# Altium PCB modulo_TB66_footprint.PcbDoc
Units mm, origin at the board's own origin, x right, y up, seen from the top; angles counter-clockwise.
Board outline 19 x 12.67 mm, 2 copper layers (Top Layer, Bottom Layer); 11 components, 8 nets, 40 pads, 9 vias.
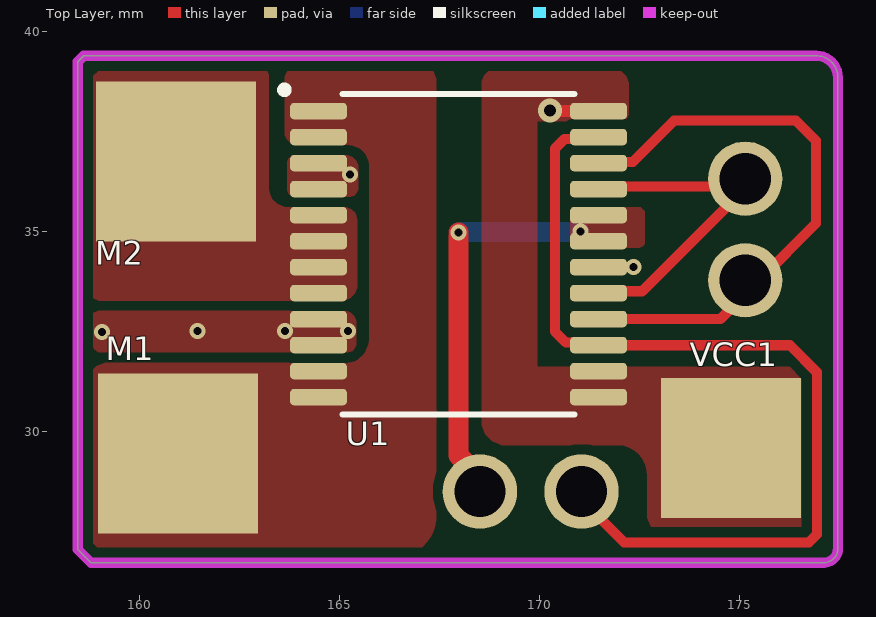
[diagram p0: Top Layer view]
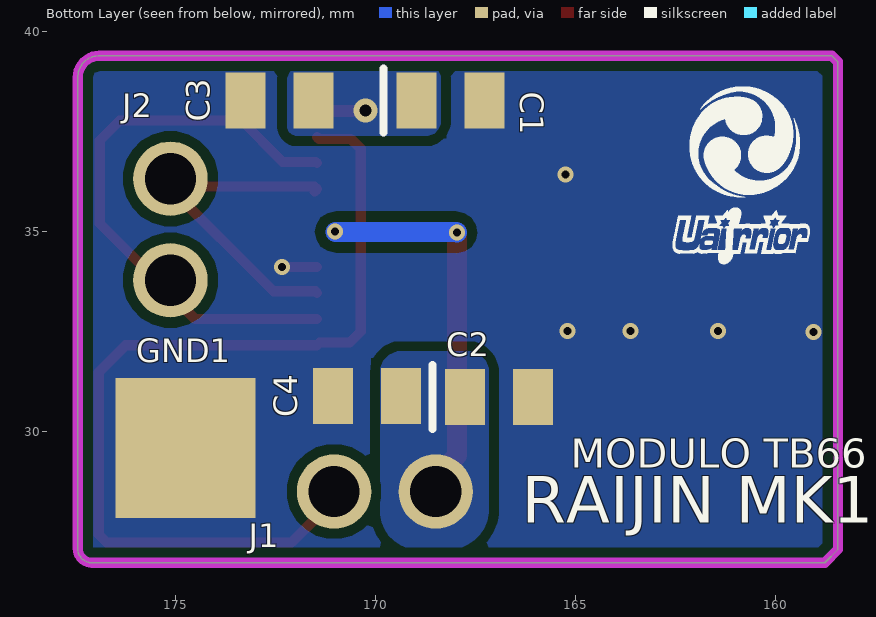
[diagram p1: Bottom Layer view, seen from below]

## Layer stack, top to bottom
Top Solder: solder mask 0.0102, Solder Resist, Dk 3.5
Top Layer: signal copper 0.0356
Dielectric 1: dielectric 0.32, FR-4, Dk 4.8
Bottom Layer: signal copper 0.0356
Bottom Solder: solder mask 0.0102, Solder Resist, Dk 3.5

## Board outline
158.877,39.395 158.598,39.395 158.445,39.243 158.445,27.051 158.775,26.721 177.096,26.721 ccw(c177.096,27.075) 177.45,27.075 177.45,38.85 ccw(c176.905,38.85) 176.905,39.395

## Design rules (kind name [scope] priority, off if disabled: settings)
Clearance [All] p1: gap=0.254 ignorepadtopadclearanceinfootprint=TRUE except(0: Arc-Hole Track-Hole SMDPad-Hole THPad-Hole Via-Hole Fill-Hole Poly-Hole Region-Hole Text-Hole)
PolygonConnect [All] p1: connectstyle=Direct reliefconductorwidth=0.254 reliefentries=4 polygonreliefangle="90 Angle" airgapwidth=0.254
RoutingVias [All] p1: holewidth=0.711 width=1.27 viastyle="Through Hole" minholewidth=0.711 minwidth=1.27 maxholewidth=0.711 maxwidth=1.27
SolderMaskExpansion [All] p1: expansion=0.102 istentingtop=FALSE
Width [All] p1: maxlimit=2 minlimit=0.254 preferedwidth=0.254 minimp=50.000000 maximp=50.000000 favimp=50.000000
30 further rules are at their usual default settings.

## Classes and differential pairs
component class "Esquematico TB66": 2 C1 C2 C3 C4 GND1 J1 J2 M2 VCC1

## Components (designator, comment, footprint, x,y, rotation, side; value= is the part's Value field where it differs from the comment)
C1 "10uF" "TANTALUM C0805" 149.999,48.077 r180 bottom
C2 "10uF" "TANTALUM C0805" 148.782,40.66 r180 bottom
C3 "0.1uF" C0805 154.268,48.077 r180 bottom
C4 "0.1uF" C0805 152.082,40.685 r180 bottom
GND1 "Ground Pad" PAD_ALIMENTAÇÃO_MINI 174.752,29.591 r0 bottom
J1 "Male Header 2" "MALE HEADER 2" 168.5,28.5 r0 bottom
J2 "Male Header 2" "MALE HEADER 2" 175.133,36.322 r270 bottom
M1 "Motor Pad" PAD_MOTOR_MINI#1 160.953,29.447 r0 top
M2 "Motor Pad" PAD_MOTOR_MINI#2 160.9,36.75 r180 bottom
U1 "TB6612FNGC8EL" "SSOP-24 (24_pins)" 167.965,34.436 r0 top
VCC1 "Source Pad" PAD_ALIMENTAÇÃO_MINI 174.777,29.591 r0 top

## Footprints (in the part's own frame and the unit in brackets; to place one, negate y for a bottom-side part, rotate by r counter-clockwise, add the part's x,y. Pads: shape width x height; smd on the part's side, far side on the other; paste and mask are expansions set on the pad)
C0805 [mm]
  rect 1x1.4 smd: 1(-18.985,-9.799) 2(-17.285,-9.799)
  body extent -19.21,-10.47 -17.06,-9.12, height 0.9
"MALE HEADER 2" [mm]
  round 1.86 hole 1.28: PIN1(0,0) PIN2(2.54,0)
  body extent -1.27,-1.27 3.81,1.27, height 8
PAD_ALIMENTAÇÃO_MINI [mm]
  rect 3.5x3.5 smd: A(0,0)
PAD_MOTOR_MINI#1 [mm]
  rect 4x4 smd: M(0,0)
PAD_MOTOR_MINI#2 [mm]
  rect 4x4 smd far side: M(0,0)
"SSOP-24 (24_pins)" [mm]
  rrect49% 1.42x0.41 smd: 1(-3.5,3.575) 2(-3.5,2.925) 3(-3.5,2.275) 4(-3.5,1.625) 5(-3.5,0.975) 6(-3.5,0.325) 7(-3.5,-0.325) 8(-3.5,-0.975) 9(-3.5,-1.625) 10(-3.5,-2.275) 11(-3.5,-2.925) 12(-3.5,-3.575) 13(3.5,-3.575) 14(3.5,-2.925) 15(3.5,-2.275) 16(3.5,-1.625) 17(3.5,-0.975) 18(3.5,-0.325) 19(3.5,0.325) 20(3.5,0.975) 21(3.5,1.625) 22(3.5,2.275) 23(3.5,2.925) 24(3.5,3.575)
  silkscreen extent -4.43,-4.01 2.9,4.19, body extent -4.93,-4.65 5.08,4.65, height 0.25
"TANTALUM C0805" [mm]
  rect 1x1.4 smd: 1(-18.985,-9.799) 2(-17.285,-9.799)
  silkscreen extent -19.8,-10.6 -19.8,-9, body extent -19.12,-10.45 -17.07,-9.15, height 1.2

## Part data
C1 C2: library part TACR106K016RTA, "CAP TAN 10uF 16V 0805", Manufacturer=AVX, Operating Temperature="-55 C ~ 125 C", Package / Case="0805 (2012 Metric)", Supplier Part Number 1=581-TACR106K016RTA, Tolerance=10%, Voltage - Rated=16V, Category="Tantalum Capacitor", ComponentLink1Description=Datasheet, ComponentLink1URL=https://br.mouser.com/datasheet/2/40/tac-776418.pdf, ComponentLink2Description="Mouser Link", ComponentLink2URL=https://br.mouser.com/ProductDetail/AVX/TACR106K016RTA?qs=%2Fha2pyFadujLeE4wL2EKCPdndIQ6DHJ9N9WnpswBy3lqS7yORyQ2ug%3D%3D, Dieletric=Tantalum, ESR="5 Ohms using 100kHz", Library Control - Checked Footprint=Yes, Library Control - Checked Schematic=Yes, Library Control - Last Update="27/06/2021 23:38", Library Control - Person that Checked Footprint=Nikaum, Library Control - Person that Checked Schematic=Nikaum, Library Control - Person that did the Last Update Footprint=Nikaum, Library Control - Person that did the Last Update Schematic=Nikaum, Library Ref=Capacitor, Part Number=TACR106K016RTA, Price="1=2.80, 10=2.26, 100=1.73 (USD)", Size / Dimension="2,00 L x 1,35 W x 1,35 H", Supplier 1=Mouser
C3 C4: library part 08053C104KAT2A, "CAP CER 0.1uF 25V X7R 0805", Manufacturer=AVX, Operating Temperature="-55 C ~ 125 C", Package / Case="0805 (2012 metric)", Supplier Part Number 1=581-08053C104K, Tolerance=10%, Voltage - Rated=25V, Category="Ceramic Capacitor", ComponentLink1Description=Datasheet, ComponentLink1URL=https://br.mouser.com/datasheet/2/40/X7RDielectric-777024.pdf, ComponentLink2Description="Mouser Link", ComponentLink2URL=https://br.mouser.com/ProductDetail/AVX/08053C104KAT2A?qs=EihRZLdKnF2GcTBzDkE%2FiQ%3D%3D, Dieletric=X7R, ESR=0.05, Library Control - Checked Footprint=Yes, Library Control - Checked Schematic=Yes, Library Control - Last Update="27/06/2021 23:35", Library Control - Person that Checked Footprint=Nikaum, Library Control - Person that Checked Schematic=Nikaum, Library Control - Person that did the Last Update Footprint=Nikaum, Library Control - Person that did the Last Update Schematic=Nikaum, Library Ref=Capacitor, Part Number=08053C104KAT2A, Price="1=0,14, 10=0,069, 100=0,038 (USD)", Size / Dimension="2,00 L x 1,20 W x 0,50 H", Supplier 1=Mouser
GND1: library part "Ground Pad Mini Sumô", "GND PAD MINI SUMÔ", Cable AWG="20 / 18 (AWG)", Library Ref=Pads, Recomended Category="Mini Sumô", Size="3.5 x 3.5 (mm)"
M1 M2: library part "Motor Pad Mini Sumô", "MOTOR PAD MINI SUMÔ", Cable AWG="20 / 18 (AWG)", Library Ref=Pads, Recomended Category="Mini Sumô", Size="3.5 x 3.5 (mm)"
U1: "IC MTR DRV (2.5V ~ 13.5V) (1A)  SSOP-24", Current - Output=1A, Current - Peak Output (Source, Sink)="3.2A / 3.2A", Logic Voltage - VIL, VIH="VIL = (-0.2 V ~ VCCx0.3 V) / VIH = (VCCx0.7 V ~ VCC+0.2 V)", Manufacturer=Toshiba, Operating Supply Current=1.2A, Operating Temperature="-20°C ~ 85°C", Package / Case=SSOP-24, Power Dissipation=1.36W, Suplier Part Number 1=757-TB6612FNGC8EL, Voltage - Load="2.5V ~ 13.5V", Voltage - Supply="2.7V ~ 5.5V", Category=Driver, ComponentLink1Description="Mouser Link / ST Link", ComponentLink1URL=https://br.mouser.com/ProductDetail/Toshiba/TB6612FNGC8EL?qs=%2Fha2pyFaduieefomnoxxebedNwY2WKSkzrp98JlLlMnHs8uJoj3o8Gf3S6kFGc6f, ComponentLink2Description=Datasheet, ComponentLink2URL=https://br.mouser.com/datasheet/2/408/TB6612FNG_datasheet_en_20141001-708260.pdf, Library Control - Checked Footprint=Yes, Library Control - Checked Schematic=Yes, Library Control - Last Update="12/06/2021 13:08", Library Control - Person that Checked Footprint="Stéfany (Ster)", Library Control - Person that Checked Schematic="Stéfany (Ster)", Library Control - Person that did the Last Update Footprint="Stéfany (Ster)", Library Control - Person that did the Last Update Schematic="Stéfany (Ster)", Library Ref=Driver, Logic (IN-SD/High Low)=IN-SD, Output Configuration="Half Bridge (4)", Part Number=TB6612FNGC8EL, Price="1=2,04000, 10=1,73000, 100=1,35000 (USD)", Rise / Fall Time (Typ)="24ns / 41ns", Supplier 1=Mouser, Technology="Power MOSFET"
VCC1: library part "Source Pad Mini Sumô", "VCC PAD MINI SUMÔ", Cable AWG="20 / 18 (AWG)", Library Ref=Pads, Recomended Category="Mini Sumô", Size="3.5 x 3.5 (mm)"
J1 J2: Library Control - Person that did the Last Update Schematic=Marcos, Library Control - Persont that did the Last Update Footprint=Marcos, Library Ref=Header, Number of Contacts=2, System=Connector

## Via types
v1: diameter 0.4, hole 0.2, Top Layer to Bottom Layer, tented both sides, 8 vias
v2: diameter 0.6, hole 0.3, Top Layer to Bottom Layer, tented both sides, 1 vias

## Nets (pads, with @x,y where several pads share a name; then routed paths per layer and width w, separated by ;. In a path a pad name is that pad's centre, name@x,y a point inside that pad or via, vN(x,y) a via of type N, cw(c..) or ccw(c..) an arc to the next point about the centre after c; other vN are vias at no path point)
GND: C1.2 C2.2 C3.1 C4.1 GND1.A U1.3 U1.4 U1.9 U1.10 U1.18 | length 0.9
  Top Layer w0.254: U1.18 v1(172.339,34.112)
  other v1: 159.055,32.487 161.442,32.512 163.627,32.512 165.202,32.512 165.252,36.424
IN1: J2.PIN1 U1.17 U1.21 | length 8.9
  Top Layer w0.254: U1.17 171.512,33.508 172.556,33.508 175.184,36.135 175.184,36.322 174.987,36.125 171.529,36.125 U1.21 U1.21@171.529,35.997
IN2: J2.PIN2 U1.16 U1.22 | length 14.8
  Top Layer w0.254: U1.16 174.511,32.811 175.184,33.484 175.184,33.782 175.482,33.782 176.9,35.2 176.9,37.275 176.4,37.775 173.357,37.775 172.323,36.74 171.494,36.74 U1.22
O1: M1.M U1.1 U1.2 U1.11 U1.12
O2: M2.M U1.5 U1.6 U1.7 U1.8
PWM: J1.PIN2 U1.15 U1.23 | length 22.9
  Top Layer w0.254: J1.PIN2@171.272,28.042 171.29,28.042 172.103,27.229 176.729,27.229 176.925,27.425 176.925,31.482 176.252,32.156 171.471,32.156 171.401,32.225 170.65,32.225 170.374,32.501 170.374,37.07 170.622,37.317 171.421,37.317 U1.23
VCC: C2.1 C4.2 J1.PIN1 U1.19 U1.20 | length 10.3
  Top Layer w0.5: v1(167.97,34.976) 167.97,29.395 168.472,28.894 168.472,28.302 J1.PIN1@168.732,28.042
  Bottom Layer w0.254: v1@171.005,34.989 v1(171.018,35.001)
  Bottom Layer w0.5: v1(167.97,34.976) 167.983,34.989 v1@171.005,34.989
VM: C1.1 C3.2 U1.13 U1.14 U1.24 VCC1.A | length 1.2
  Top Layer w0.254: v2(170.256,38.024) v2@170.263,38.017 ; U1.24@171.459,38.017 U1.24
  Top Layer w0.3: v2@170.263,38.017 U1.24@171.459,38.017

## Polygon pours and split planes (outlines as drawn)
VM on Top Layer "VM_L01_P052" (solid, pour order 52): 176.643,31.312 176.643,27.756 cw(c176.262,27.756) 176.262,27.375 173.265,27.375 cw(c173.265,27.959) 172.681,27.959 172.681,28.797 ccw(c171.922,28.896) 172.02,29.655 169.17,29.655 cw(c169.17,30.285) 168.541,30.285 168.541,38.672 cw(c168.953,38.672) 168.953,39.084 171.766,39.084 cw(c171.766,38.627) 172.224,38.627 172.224,37.967 cw(c172.02,37.967) 172.02,37.763 169.938,37.763 169.938,31.617 176.338,31.617 cw(c176.338,31.312)
VCC on Top Layer "VCC_L01_P053" (solid, pour order 53): 172.618,35.509 172.618,34.722 cw(c172.491,34.722) 172.491,34.595 170.815,34.595 cw(c170.815,34.747) 170.663,34.747 170.663,35.458 cw(c170.815,35.458) 170.815,35.611 172.517,35.611 cw(c172.517,35.509)
O1 on Top Layer "O1_L01_P059" (solid, pour order 59): 164.084,39.243 ccw(c164.084,38.786) 163.627,38.786 163.627,37.49 ccw(c163.957,37.49) 163.957,37.16 165.227,37.16 cw(c165.227,36.652) 165.735,36.652 165.735,32.309 cw(c165.151,32.309) 165.151,31.725 159.258,31.725 ccw(c159.258,31.115) 158.648,31.115 158.648,27.483 ccw(c159.258,27.483) 159.258,26.873 166.395,26.873 ccw(c166.395,27.889) 167.411,27.889 167.411,38.71 ccw(c166.878,38.71) 166.878,39.243
GND on Top Layer "GND_L01_P058" (solid, pour order 58): 158.598,32.791 158.598,32.283 ccw(c158.902,32.283) 158.902,31.979 165.176,31.979 ccw(c165.176,32.207) 165.405,32.207 165.405,32.715 ccw(c165.1,32.715) 165.1,33.02 158.826,33.02 ccw(c158.826,32.791)
GND on Top Layer "GND_L01_P056" (solid, pour order 56): 163.881,36.906 ccw(c163.881,36.703) 163.678,36.703 163.678,36.068 ccw(c163.881,36.068) 163.881,35.865 165.227,35.865 ccw(c165.227,36.093) 165.456,36.093 165.456,36.601 ccw(c165.151,36.601) 165.151,36.906
O2 on Top Layer "O2_L01_P055" (solid, pour order 55): 165.43,33.68 cw(c165.024,33.68) 165.024,33.274 159.055,33.274 cw(c159.055,33.706) 158.623,33.706 158.623,38.659 cw(c159.207,38.659) 159.207,39.243 162.814,39.243 cw(c162.814,38.837) 163.22,38.837 163.22,36.093 ccw(c163.703,36.093) 163.703,35.611 165.1,35.611 cw(c165.1,35.281) 165.43,35.281
VCC on Bottom Layer "VCC_L02_P046" (solid, pour order 46): 167.17,28.069 167.17,31.471 cw(c167.703,31.471) 167.703,32.004 169.355,32.004 cw(c169.355,31.471) 169.888,31.471 169.888,28.016 cw(c168.921,28.016) 168.921,27.05 168.189,27.05 cw(c168.189,28.069)
GND on Bottom Layer "GND_L02_P054" (solid, remove dead copper, pour order 54): 159.233,39.243 ccw(c159.233,38.633) 158.623,38.633 158.623,27.534 ccw(c159.283,27.534) 159.283,26.873 176.698,26.873 ccw(c176.698,27.475) 177.3,27.475 177.3,38.601 ccw(c176.604,38.601) 176.602,39.297
VM on Bottom Layer "VM_L02_P051" (solid, pour order 51): 168.707,39.141 ccw(c168.707,38.811) 168.377,38.811 168.377,37.77 ccw(c168.758,37.77) 168.758,37.389 171.958,37.389 ccw(c171.958,37.643) 172.212,37.643 172.212,38.76 ccw(c171.831,38.76) 171.831,39.141

## Keep-outs
Keep-Out Layer:
  the board outline again, w0.254

## Silkscreen, mask and mechanical layers (free items; w line width, h text height)
Bottom Overlay:
  drawing of 9 lines, arcs and shapes, not listed
  text "MODULO TB66" at 165.127,28.842 h1.25
  text "RAIJIN MK1" at 166.346,27.338 h2
BoardOutLine:
  the board outline again, w0.254